# Altium PCB BOOSTXL-K350QVG-S1.PcbDoc (part 4 of 4)
Units mm, origin at the board's own origin, x right, y up, seen from the top; angles counter-clockwise.
Board outline 152.4 x 101.6 mm, 2 copper layers (Top Layer, Bottom Layer); 36 components, 58 nets, 6671 pads, 44 vias.
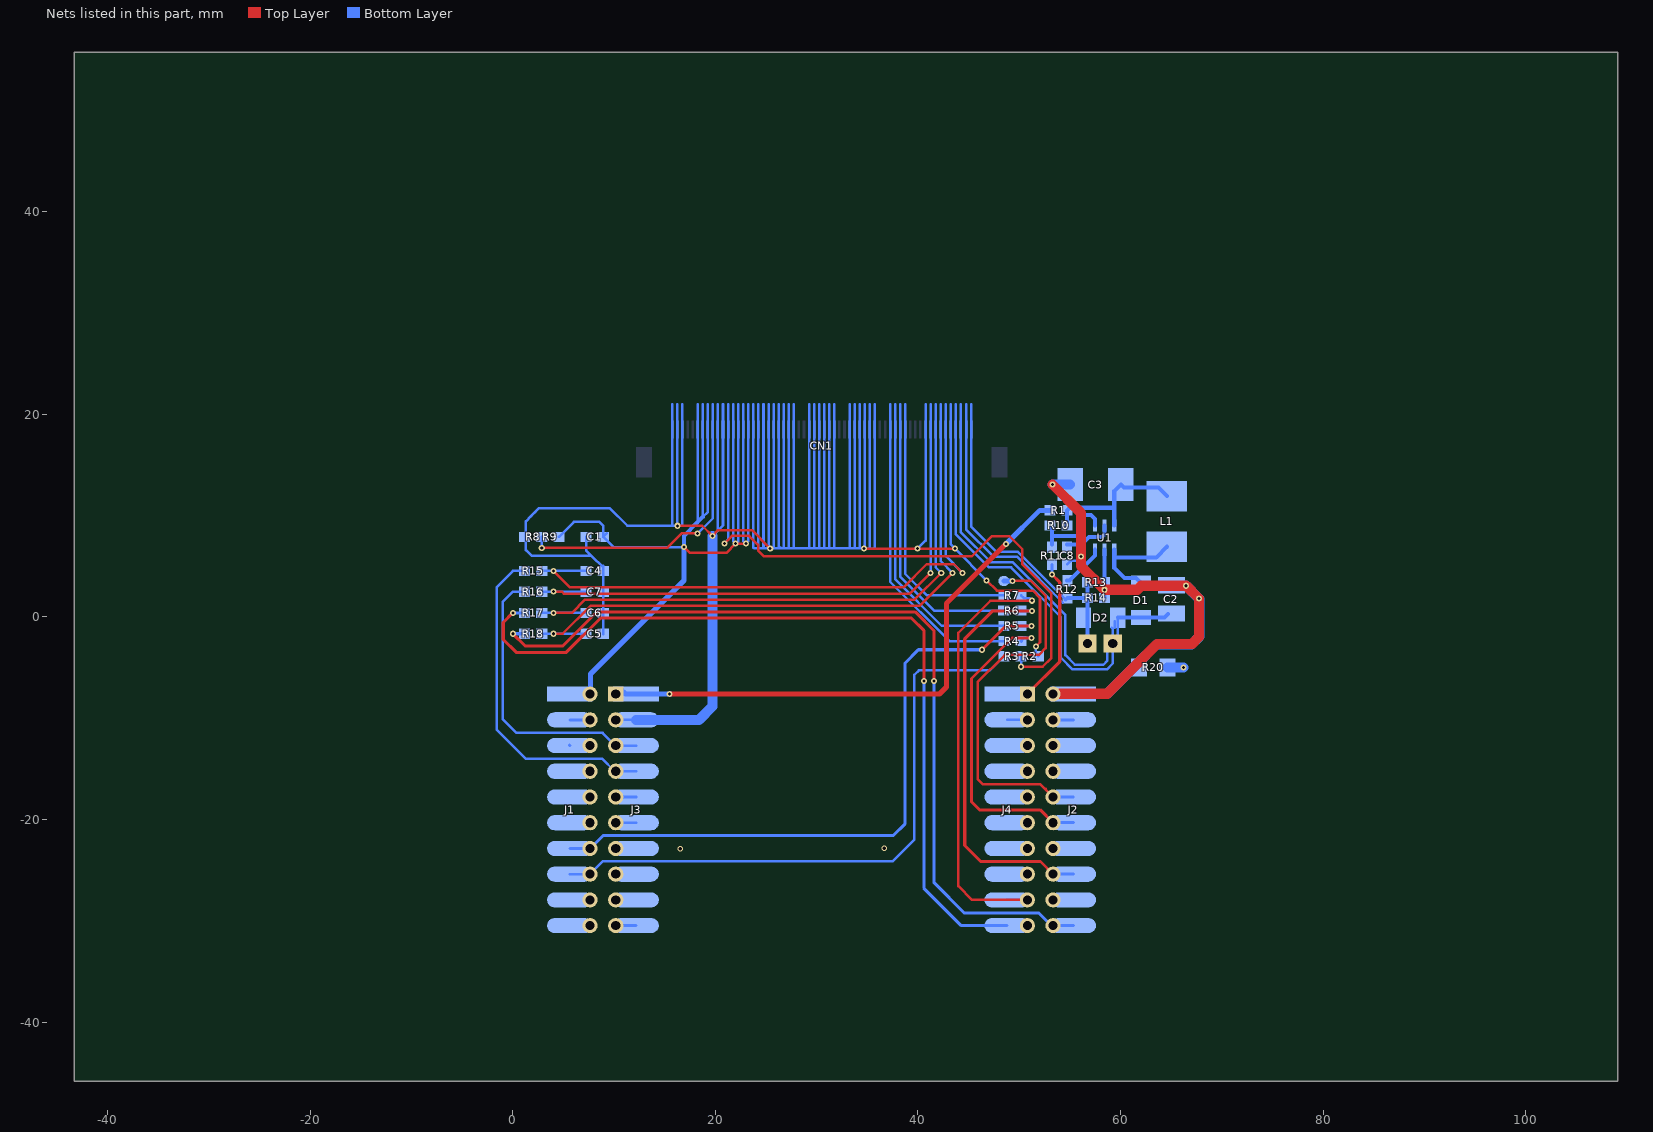
[diagram p4: the nets of this part, all layers, seen from the top]

## Free pads (board coordinates) (continued)
  round 0.018 on Bottom Overlay: 1(66.684,19.707) 1(66.684,20.205) 1(66.701,15.209) 1(66.701,18.16) 1(66.701,18.178) 1(66.701,18.196) 1(66.701,18.213) 1(66.701,19.689) 1(66.701,20.347) 1(66.719,15.226) 1(66.719,15.369) 1(66.719,18.107) 1(66.719,18.125) 1(66.719,18.142) 1(66.719,19.671) 1(66.719,20.187) 1(66.719,20.329) 1(66.737,15.244) 1(66.737,15.386) 1(66.737,18.053) 1(66.737,18.071) 1(66.737,18.089) 1(66.737,19.654) 1(66.737,20.169) 1(66.737,20.311) 1(66.755,15.262) 1(66.755,15.404) 1(66.755,18) 1(66.755,18.018) 1(66.755,18.036) 1(66.755,19.618) 1(66.755,19.636) 1(66.755,20.151) 1(66.755,20.294) 1(66.772,17.929) 1(66.772,17.947) 1(66.772,17.965) 1(66.772,17.982) 1(66.772,19.6) 1(66.772,20.134) 1(66.79,15.28) 1(66.79,15.422) 1(66.79,17.876) 1(66.79,17.893) 1(66.79,17.911) 1(66.79,19.582) 1(66.79,20.116) 1(66.79,20.276) 1(66.808,15.298) 1(66.808,15.44) 1(66.808,17.822) 1(66.808,17.84) 1(66.808,17.858) 1(66.808,19.565) 1(66.808,20.258) 1(66.826,15.315) 1(66.826,15.458) 1(66.826,17.751) 1(66.826,17.769) 1(66.826,17.787) 1(66.826,17.804) 1(66.826,19.511) 1(66.826,19.547) 1(66.826,20.098) 1(66.826,20.24) 1(66.844,15.475) 1(66.844,17.698) 1(66.844,17.716) 1(66.844,17.733) 1(66.844,19.511) 1(66.844,19.529) 1(66.844,20.08) 1(66.861,15.333) 1(66.861,15.493) 1(66.861,17.644) 1(66.861,17.662) 1(66.861,17.68) 1(66.861,19.494) 1(66.861,19.511) 1(66.861,20.063) 1(66.861,20.223) 1(66.879,15.351) 1(66.879,17.573) 1(66.879,17.591) 1(66.879,17.609) 1(66.879,17.627) 1(66.879,19.458) 1(66.879,19.476) 1(66.879,20.205) 1(66.897,15.369) 1(66.897,15.511) 1(66.897,17.52) 1(66.897,17.538) 1(66.897,17.556) 1(66.897,19.422) 1(66.897,19.44) 1(66.897,20.045) 1(66.897,20.187) 1(66.915,15.529) 1(66.915,17.484) 1(66.915,17.502) 1(66.915,19.387) 1(66.915,19.405) 1(66.915,20.027) 1(66.932,15.386) 1(66.932,19.351) 1(66.932,19.369) 1(66.932,20.169) 1(66.95,15.404) 1(66.95,15.546) 1(66.95,19.316) 1(66.95,19.334) 1(66.95,20.009) 1(66.95,20.151) 1(66.968,15.422) 1(66.968,15.564) 1(66.968,19.298) 1(66.968,19.974) 1(66.968,19.991) 1(66.968,20.134) 1(66.986,15.582) 1(66.986,15.6) 1(66.986,17.484) 1(66.986,19.262) 1(66.986,19.28) 1(66.986,19.956) 1(67.004,15.44) 1(67.004,15.618) 1(67.004,19.227) 1(67.004,19.245) 1(67.004,19.938) 1(67.004,20.116) 1(67.021,15.458) 1(67.021,15.635) 1(67.021,19.191) 1(67.021,19.209) 1(67.021,19.903) 1(67.021,19.92) 1(67.021,20.098) 1(67.039,15.475) 1(67.039,15.653) 1(67.039,15.671) 1(67.039,19.156) 1(67.039,19.174) 1(67.039,19.885) 1(67.039,20.08) 1(67.057,15.493) 1(67.057,15.689) 1(67.057,19.12) 1(67.057,19.138) 1(67.057,19.867) 1(67.057,20.063) 1(67.075,15.511) 1(67.075,15.529) 1(67.075,15.706) 1(67.075,19.085) 1(67.075,19.102) 1(67.075,19.831) 1(67.075,19.849) 1(67.075,20.027) 1(67.075,20.045) 1(67.092,15.546) 1(67.092,15.724) 1(67.092,15.742) 1(67.092,17.502) 1(67.092,19.067) 1(67.092,19.814) 1(67.092,20.009) 1(67.11,15.564) 1(67.11,15.76) 1(67.11,19.031) 1(67.11,19.049) 1(67.11,19.796) 1(67.11,19.991) 1(67.128,15.582) 1(67.128,15.778) 1(67.128,18.996) 1(67.128,19.014) 1(67.128,19.76) 1(67.128,19.778) 1(67.128,19.956) 1(67.128,19.974) 1(67.146,15.6) 1(67.146,15.795) 1(67.146,15.813) 1(67.146,18.96) 1(67.146,18.978) 1(67.146,19.743) 1(67.146,19.938) 1(67.164,15.618) 1(67.164,15.635) 1(67.164,15.831) 1(67.164,18.925) 1(67.164,18.942) 1(67.164,19.725) 1(67.164,19.92) 1(67.181,15.653) 1(67.181,15.849) 1(67.181,18.889) 1(67.181,18.907) 1(67.181,19.689) 1(67.181,19.707) 1(67.181,19.885) 1(67.181,19.903) 1(67.199,15.671) 1(67.199,15.866) 1(67.199,15.884) 1(67.199,17.52) 1(67.199,18.854) 1(67.199,18.871) 1(67.199,19.671) 1(67.199,19.867) 1(67.217,15.689) 1(67.217,15.902) 1(67.217,18.836) 1(67.217,19.654) 1(67.217,19.849) 1(67.235,15.706) 1(67.235,15.724) 1(67.235,15.92) 1(67.235,18.8) 1(67.235,18.818) 1(67.235,19.618) 1(67.235,19.636) 1(67.235,19.814) 1(67.235,19.831) 1(67.252,15.742) 1(67.252,15.938) 1(67.252,15.955) 1(67.252,18.765) 1(67.252,18.782) 1(67.252,19.6) 1(67.252,19.796) 1(67.27,15.76) 1(67.27,15.973) 1(67.27,18.729) 1(67.27,18.747) 1(67.27,19.582) 1(67.27,19.778) 1(67.288,15.778) 1(67.288,15.795) 1(67.288,15.991) 1(67.288,18.693) 1(67.288,18.711) 1(67.288,19.547) 1(67.288,19.565) 1(67.288,19.76) 1(67.306,15.813) 1(67.306,16.009) 1(67.306,16.026) 1(67.306,17.538) 1(67.306,18.658) 1(67.306,18.676) 1(67.306,19.529) 1(67.306,19.725) 1(67.306,19.743) 1(67.324,15.831) 1(67.324,16.044) 1(67.324,18.622) 1(67.324,18.64) 1(67.324,19.511) 1(67.324,19.707) 1(67.341,15.849) 1(67.341,15.866) 1(67.341,16.062) 1(67.341,18.587) 1(67.341,18.605) 1(67.341,19.476) 1(67.341,19.494) 1(67.341,19.689) 1(67.359,15.884) 1(67.359,16.08) 1(67.359,16.098) 1(67.359,18.533) 1(67.359,18.551) 1(67.359,18.569) 1(67.359,19.458) 1(67.359,19.654) 1(67.359,19.671) 1(67.377,15.902) 1(67.377,16.115) 1(67.377,18.462) 1(67.377,18.48) 1(67.377,18.498) 1(67.377,18.516) 1(67.377,19.422) 1(67.377,19.44) 1(67.377,19.636) 1(67.395,15.92) 1(67.395,15.938) 1(67.395,16.133) 1(67.395,18.409) 1(67.395,18.427) 1(67.395,18.445) 1(67.395,19.405) 1(67.395,19.618) 1(67.413,15.955) 1(67.413,16.151) 1(67.413,16.169) 1(67.413,17.556) 1(67.413,18.356) 1(67.413,18.373) 1(67.413,18.391) 1(67.413,19.387) 1(67.413,19.582) 1(67.413,19.6) 1(67.43,15.973) 1(67.43,15.991) 1(67.43,16.187) 1(67.43,18.285) 1(67.43,18.302) 1(67.43,18.32) 1(67.43,18.338) 1(67.43,19.369) 1(67.43,19.565) 1(67.448,16.009) 1(67.448,16.204) 1(67.448,16.222) 1(67.448,18.231) 1(67.448,18.249) 1(67.448,18.267) 1(67.448,19.334) 1(67.448,19.351) 1(67.448,19.547) 1(67.466,16.026) 1(67.466,16.24) 1(67.466,16.258) 1(67.466,18.178) 1(67.466,18.196) 1(67.466,18.213) 1(67.466,19.298) 1(67.466,19.316) 1(67.466,19.511) 1(67.466,19.529) 1(67.484,16.044) 1(67.484,16.062) 1(67.484,16.275) 1(67.484,16.293) 1(67.484,18.125) 1(67.484,18.142) 1(67.484,18.16) 1(67.484,19.245) 1(67.484,19.262) 1(67.484,19.28) 1(67.484,19.494) 1(67.501,16.08) 1(67.501,16.311) 1(67.501,16.329) 1(67.501,16.347) 1(67.501,17.573) 1(67.501,18.053) 1(67.501,18.071) 1(67.501,18.089) 1(67.501,18.107) 1(67.501,19.209) 1(67.501,19.227) 1(67.501,19.476) 1(67.519,16.098) 1(67.519,16.364) 1(67.519,16.382) 1(67.519,18) 1(67.519,18.018) 1(67.519,18.036) 1(67.519,19.174) 1(67.519,19.191) 1(67.519,19.44) 1(67.519,19.458) 1(67.537,16.115) 1(67.537,16.133) 1(67.537,16.4) 1(67.537,16.418) 1(67.537,17.947) 1(67.537,17.965) 1(67.537,17.982) 1(67.537,19.12) 1(67.537,19.138) 1(67.537,19.156) 1(67.537,19.422) 1(67.555,16.151) 1(67.555,16.169) 1(67.555,16.435) 1(67.555,16.453) 1(67.555,16.471) 1(67.555,17.893) 1(67.555,17.911) 1(67.555,17.929) 1(67.555,19.085) 1(67.555,19.102) 1(67.555,19.387) 1(67.555,19.405) 1(67.573,16.187) 1(67.573,16.204) 1(67.573,16.489) 1(67.573,16.507) 1(67.573,17.822) 1(67.573,17.84) 1(67.573,17.858) 1(67.573,17.876) 1(67.573,19.031) 1(67.573,19.049) 1(67.573,19.067) 1(67.573,19.351) 1(67.573,19.369) 1(67.59,16.222) 1(67.59,16.24) 1(67.59,16.524) 1(67.59,16.542) 1(67.59,17.591) 1(67.59,17.769) 1(67.59,17.787) 1(67.59,17.804) 1(67.59,18.996) 1(67.59,19.014) 1(67.59,19.298) 1(67.59,19.316) 1(67.59,19.334) 1(67.608,16.258) 1(67.608,16.275) 1(67.608,16.56) 1(67.608,16.578) 1(67.608,16.595) 1(67.608,17.698) 1(67.608,17.716) 1(67.608,17.733) 1(67.608,17.751) 1(67.608,18.942) 1(67.608,18.96) 1(67.608,18.978) 1(67.608,19.262) 1(67.608,19.28) 1(67.626,16.293) 1(67.626,16.311) 1(67.626,16.329) 1(67.626,16.613) 1(67.626,16.631) 1(67.626,17.644) 1(67.626,17.662) 1(67.626,17.68) 1(67.626,18.907) 1(67.626,18.925) 1(67.626,19.227) 1(67.626,19.245) 1(67.644,16.347) 1(67.644,16.364) 1(67.644,16.649) 1(67.644,16.667) 1(67.644,17.609) 1(67.644,17.627) 1(67.644,18.871) 1(67.644,18.889) 1(67.644,19.174) 1(67.644,19.191) 1(67.644,19.209) 1(67.661,16.382) 1(67.661,16.4) 1(67.661,16.418) 1(67.661,16.684) 1(67.661,16.702) 1(67.661,16.72) 1(67.661,18.818) 1(67.661,18.836) 1(67.661,18.854) 1(67.661,19.138) 1(67.661,19.156) 1(67.679,16.435) 1(67.679,16.453) 1(67.679,16.738) 1(67.679,16.755) 1(67.679,18.782) 1(67.679,18.8) 1(67.679,19.085) 1(67.679,19.102) 1(67.679,19.12) 1(67.697,16.471) 1(67.697,16.489) 1(67.697,16.773) 1(67.697,16.791) 1(67.697,16.809) 1(67.697,18.729) 1(67.697,18.747) 1(67.697,18.765) 1(67.697,19.049) 1(67.697,19.067) 1(67.715,16.507) 1(67.715,16.524) 1(67.715,16.542) 1(67.715,16.827) 1(67.715,16.844) 1(67.715,16.862) 1(67.715,18.693) 1(67.715,18.711) 1(67.715,18.996) 1(67.715,19.014) 1(67.715,19.031) 1(67.733,16.56) 1(67.733,16.578) 1(67.733,16.88) 1(67.733,16.898) 1(67.733,18.658) 1(67.733,18.676) 1(67.733,18.96) 1(67.733,18.978) 1(67.75,16.595) 1(67.75,16.613) 1(67.75,16.631) 1(67.75,16.915) 1(67.75,16.933) 1(67.75,18.622) 1(67.75,18.64) 1(67.75,18.907) 1(67.75,18.925) 1(67.75,18.942) 1(67.768,16.649) 1(67.768,16.667) 1(67.768,16.951) 1(67.768,16.969) 1(67.768,16.987) 1(67.768,17.004) 1(67.768,17.022) 1(67.768,18.445) 1(67.768,18.462) 1(67.768,18.48) 1(67.768,18.498) 1(67.768,18.516) 1(67.768,18.533) 1(67.768,18.551) 1(67.768,18.569) 1(67.768,18.587) 1(67.768,18.605) 1(67.768,18.871) 1(67.768,18.889) 1(67.786,16.684) 1(67.786,16.702) 1(67.786,16.72) 1(67.786,17.04) 1(67.786,17.058) 1(67.786,17.076) 1(67.786,17.093) 1(67.786,17.111) 1(67.786,17.129) 1(67.786,17.147) 1(67.786,17.164) 1(67.786,17.182) 1(67.786,17.2) 1(67.786,18.356) 1(67.786,18.373) 1(67.786,18.391) 1(67.786,18.409) 1(67.786,18.427) 1(67.786,18.836) 1(67.786,18.854) 1(67.804,16.738) 1(67.804,16.755) 1(67.804,17.218) 1(67.804,17.236) 1(67.804,17.253) 1(67.804,17.271) 1(67.804,17.289) 1(67.804,17.307) 1(67.804,17.324) 1(67.804,17.342) 1(67.804,17.36) 1(67.804,18.178) 1(67.804,18.196) 1(67.804,18.213) 1(67.804,18.231) 1(67.804,18.249) 1(67.804,18.267) 1(67.804,18.285) 1(67.804,18.302) 1(67.804,18.32) 1(67.804,18.338) 1(67.804,18.782) 1(67.804,18.8) 1(67.804,18.818) 1(67.821,16.773) 1(67.821,16.791) 1(67.821,16.809) 1(67.821,17.378) 1(67.821,17.396) 1(67.821,17.413) 1(67.821,17.431) 1(67.821,17.449) 1(67.821,17.467) 1(67.821,18.018) 1(67.821,18.036) 1(67.821,18.053) 1(67.821,18.071) 1(67.821,18.089) 1(67.821,18.107) 1(67.821,18.125) 1(67.821,18.142) 1(67.821,18.16) 1(67.821,18.747) 1(67.821,18.765) 1(67.839,16.827) 1(67.839,16.844) 1(67.839,16.862) 1(67.839,17.484) 1(67.839,17.502) 1(67.839,17.52) 1(67.839,17.538) 1(67.839,17.556) 1(67.839,17.573) 1(67.839,17.591) 1(67.839,17.609) 1(67.839,17.627) 1(67.839,17.929) 1(67.839,17.947) 1(67.839,17.965) 1(67.839,17.982) 1(67.839,18) 1(67.839,18.693) 1(67.839,18.711) 1(67.839,18.729) 1(67.857,16.88) 1(67.857,16.898) 1(67.857,17.644) 1(67.857,17.662) 1(67.857,17.68) 1(67.857,17.698) 1(67.857,17.804) 1(67.857,17.822) 1(67.857,17.84) 1(67.857,17.858) 1(67.857,17.876) 1(67.857,17.893) 1(67.857,17.911) 1(67.857,18.658) 1(67.857,18.676) 1(67.875,16.915) 1(67.875,16.933) 1(67.875,16.951) 1(67.875,16.969) 1(67.875,16.987) 1(67.875,17.716) 1(67.875,17.733) 1(67.875,17.751) 1(67.875,17.769) 1(67.875,17.787) 1(67.875,18.587) 1(67.875,18.605) 1(67.875,18.622) 1(67.875,18.64) 1(67.893,17.004) 1(67.893,17.022) 1(67.893,17.04) 1(67.893,17.058) 1(67.893,18.445) 1(67.893,18.462) 1(67.893,18.48) 1(67.893,18.498) 1(67.893,18.516) 1(67.893,18.533) 1(67.893,18.551) 1(67.893,18.569) 1(67.91,17.076) 1(67.91,17.093) 1(67.91,17.111) 1(67.91,17.129) 1(67.91,17.147) 1(67.91,17.164) 1(67.91,17.182) 1(67.91,17.2) 1(67.91,18.356) 1(67.91,18.373) 1(67.91,18.391) 1(67.91,18.409) 1(67.91,18.427) 1(67.928,17.218) 1(67.928,17.236) 1(67.928,17.253) 1(67.928,17.271) 1(67.928,17.289) 1(67.928,17.307) 1(67.928,17.324) 1(67.928,17.342) 1(67.928,18.213) 1(67.928,18.231) 1(67.928,18.249) 1(67.928,18.267) 1(67.928,18.285) 1(67.928,18.302) 1(67.928,18.32) 1(67.928,18.338) 1(67.946,17.36) 1(67.946,17.378) 1(67.946,17.396) 1(67.946,17.413) 1(67.946,17.431) 1(67.946,17.449) 1(67.946,17.467) 1(67.946,18.089) 1(67.946,18.107) 1(67.946,18.125) 1(67.946,18.142) 1(67.946,18.16) 1(67.946,18.178) 1(67.946,18.196) 1(67.964,17.484) 1(67.964,17.502) 1(67.964,17.52) 1(67.964,17.538) 1(67.964,17.556) 1(67.964,17.573) 1(67.964,17.965) 1(67.964,17.982) 1(67.964,18) 1(67.964,18.018) 1(67.964,18.036) 1(67.964,18.053) 1(67.964,18.071) 1(67.981,17.591) 1(67.981,17.609) 1(67.981,17.627) 1(67.981,17.644) 1(67.981,17.662) 1(67.981,17.68) 1(67.981,17.698) 1(67.981,17.84) 1(67.981,17.858) 1(67.981,17.876) 1(67.981,17.893) 1(67.981,17.911) 1(67.981,17.929) 1(67.981,17.947) 1(67.999,17.716) 1(67.999,17.733) 1(67.999,17.751) 1(67.999,17.769) 1(67.999,17.787) 1(67.999,17.804) 1(67.999,17.822)
  round 1.5 hole 0.9: 2(7.62,-7.62) 2(53.34,-7.62) 3(10.16,-10.16) 3(50.8,-10.16) 4(7.62,-10.16) 4(53.34,-10.16) 5(10.16,-12.7) 5(50.8,-12.7) 6(7.62,-12.7) 6(53.34,-12.7) 7(10.16,-15.24) 7(50.8,-15.24) 8(7.62,-15.24) 8(53.34,-15.24) 9(10.16,-17.78) 9(50.8,-17.78) 10(7.62,-17.78) 10(53.34,-17.78) 11(10.16,-20.32) 11(50.8,-20.32) 12(7.62,-20.32) 12(53.34,-20.32) 13(10.16,-22.86) 13(50.8,-22.86) 14(7.62,-22.86) 14(53.34,-22.86) 15(10.16,-25.4) 15(50.8,-25.4) 16(7.62,-25.4) 16(53.34,-25.4) 17(10.16,-27.94) 17(50.8,-27.94) 18(7.62,-27.94) 18(53.34,-27.94) 19(10.16,-30.48) 19(50.8,-30.48) 20(7.62,-30.48) 20(53.34,-30.48)
  rect 1.8x1.8 hole 0.9: 16(56.73,-2.62) 16(59.23,-2.62)

## Via types
v1: diameter 0.6, hole 0.3, Top Layer to Bottom Layer, 42 vias
v2: diameter 0.55, hole 0.35, Top Layer to Bottom Layer, 2 vias

## Nets (pads, with @x,y where several pads share a name; then routed paths per layer and width w, separated by ;. In a path a pad name is that pad's centre, name@x,y a point inside that pad or via, vN(x,y) a via of type N, cw(c..) or ccw(c..) an arc to the next point about the centre after c; other vN are vias at no path point)
3V3: C1.2 CN1.45 CN1.46 CN1.47 CN1.48 CN1.53 CN1.54 CN1.55 J1.1 pad.2@7.62,-7.62 R9.2 | length 133
  Top Layer w0.25: v1(16.9,6.9) 17.47,6.33 21.08,6.33 v1(22,7.25) 22.01,7.24 v1(23,7.24)
  Bottom Layer w0.25: R9.2@4.55,7.9 6.03,9.38 8.55,9.38 8.92,9.01 C1.2@8.92,7.91 ; C1.2@9.25,8.24 C1.2@8.92,7.91 ; v1(16.9,6.9) 9.93,6.9 C1.2@8.93,7.9 C1.2@8.92,7.91 ; 18.246,9.35 CN1.55@18.246,18.508 18.246,20.996 ; 18.746,20.996 CN1.54@18.746,18.508 18.746,9.85 19.246,10.35 CN1.53@19.246,18.508 19.246,20.996 ; 21.746,20.996 CN1.48@21.746,18.508 21.746,7.504 v1(22,7.25) ; v1@22.246,7.25 CN1.47@22.246,18.508 22.246,20.996 ; 22.746,20.996 CN1.46@22.746,18.508 22.746,7.494 v1(23,7.24) 23.246,7.486 CN1.45@23.246,18.508 23.246,20.996
  Bottom Layer w0.4: v1(16.9,6.9) 16.9,8.004 18.246,9.35 18.746,9.85
  Bottom Layer w0.5: J1.1@7.555,-7.195 7.66,-7.09 7.66,-5.64 16.9,3.6 v1(16.9,6.9)
5V0: J3.1 pad.1@10.16,-7.62 R1.2 | length 54.9
  Top Layer w0.5: v1(15.48,-7.62) 42.13,-7.62 42.82,-6.93 42.82,1.34 v1(48.68,7.2)
  Bottom Layer w0.5: J3.1@10.65,-7.13 11.14,-7.62 J3.1@12.16,-7.62 v1(15.48,-7.62) ; v1(48.68,7.2) 48.7,7.2 52.03,10.53 R1.2@53.03,10.53
AGND: C2.1 C3.2 C8.1 J2.1 pad.2@53.34,-7.62 R13.2 R14.2 R20.2 U1.2 | length 74
  Top Layer w1: v1(53.28,13.08) 56.08,10.28 v1(56.08,5.98) 56.08,5.033 v1(58.433,2.68) 61.65,2.68 62.05,3.08 v1(66.48,3.08) 67.75,1.81 v1(67.75,1.8) 67.75,-1.97 67.03,-2.69 63.59,-2.69 58.69,-7.59 53.37,-7.59 pad.2@53.34,-7.62
  Bottom Layer w0.25: J2.1@53.34,-7.597 pad.2@53.34,-7.62 J2.1@55.34,-7.62 ; C8.1@54.73,5.18 55.115,5.565 55.665,5.565 v1(56.08,5.98) ; C3.2@55.024,13.08 C3.2@55.03,13.074 ; R14.2@58.43,1.88 R14.2@58.433,1.883
  Bottom Layer w0.3: C2.1@64.68,3.08 C2.1@65.03,3.08
  Bottom Layer w0.4: R14.2@58.433,1.883 v1(58.433,2.68) 58.433,3.43 U1.2@58.433,6.635
  Bottom Layer w1: v1(53.28,13.08) C3.2@55.024,13.08 ; J2.1@55.34,-7.62 58.65,-7.62 61.555,-4.715 63.55,-2.72 67,-2.72 67.775,-1.945 67.775,1.785 67.755,1.805 v1(66.48,3.08)
CS: CN1.15 R6.2 | length 28.6
  Bottom Layer w0.25: 38.246,20.996 CN1.15@38.246,18.508 38.246,3.974 41.6,0.62 R6.2@48.47,0.62
GND: C1.1 C4.1 C5.1 C6.1 C7.1 CN1.5 CN1.10 CN1.20 CN1.21 CN1.22 CN1.23 CN1.24 CN1.25 CN1.28 CN1.29 CN1.30 CN1.31 CN1.32 CN1.33 CN1.36 CN1.37 CN1.38 CN1.39 CN1.40 CN1.41 CN1.42 CN1.43 CN1.44 CN1.50 CN1.51 CN1.58 CN1.59 CN1.60 J3.2 pad.3@10.16,-10.16 R2.1 R8.2 R20.1 | length 504.2
  Top Layer w0.25: v1(16.25,9) 18.7,9 v1(19.7,8) 20.27,8.57 23.6,8.57 v1(25.41,6.76) ; v1@34.67,6.75 v1(39.95,6.75) v1(43.65,6.75) ; v1(46.784,3.616) 47.8,2.6 51.34,2.6 52.05,1.89 52.05,-2.5 v1(51.64,-2.91)
  Bottom Layer w0.25: 2.19,10.34 1.803,9.953 ; C1.1@7.23,7.9 7.23,6.56 7.76,6.03 ; C5.1@8.93,-1.69 C5.1@8.93,-1.66 8.93,0.4 C7.1@8.93,2.49 8.93,3.75 C4.1@8.93,4.54 C4.1@8.93,4.86 ; C4.1@8.93,5.03 C4.1@8.93,4.86 ; pad.3@10.16,-10.16 J3.2@12.16,-10.16 ; 15.746,20.996 CN1.60@15.746,18.508 15.746,9 ; 16.246,20.996 CN1.59@16.246,18.508 16.246,9 15.746,9 ; v1(16.25,9) 16.646,9 16.746,9.1 CN1.58@16.746,18.508 16.746,20.996 ; v1(19.7,8) 20.246,8.546 ; 20.246,20.996 CN1.51@20.246,18.508 20.246,8.546 ; 20.746,20.996 CN1.50@20.746,18.508 20.746,9.046 20.246,8.546 ; 23.746,20.996 CN1.44@23.746,18.508 23.746,6.854 23.84,6.76 24.29,6.76 ; 24.246,20.996 CN1.43@24.246,18.508 24.246,6.804 24.29,6.76 ; 24.746,20.996 CN1.42@24.746,18.508 24.746,6.806 24.7,6.76 ; 25.246,20.996 CN1.41@25.246,18.508 25.246,6.924 v1(25.41,6.76) ; 25.746,20.996 CN1.40@25.746,18.508 25.746,6.874 25.86,6.76 ; 26.246,20.996 CN1.39@26.246,18.508 26.246,7.024 26.51,6.76 ; 26.746,20.996 CN1.38@26.746,18.508 26.746,6.846 26.66,6.76 ; 27.246,20.996 CN1.37@27.246,18.508 27.246,6.796 27.21,6.76 ; 27.746,20.996 CN1.36@27.746,18.508 27.746,6.874 27.86,6.76 ; 29.246,20.996 CN1.33@29.246,18.508 29.246,6.796 29.21,6.76 ; 29.746,20.996 CN1.32@29.746,18.508 29.746,6.824 29.81,6.76 ; 30.246,6.774 CN1.31@30.246,18.508 30.246,20.996 ; 30.746,20.996 CN1.30@30.746,18.508 30.746,6.796 30.71,6.76 ; 31.246,6.774 CN1.29@31.246,18.508 31.246,20.996 ; 31.746,20.996 CN1.28@31.746,18.508 31.746,6.796 31.71,6.76 ; 33.246,20.996 CN1.25@33.246,18.508 33.246,6.796 33.21,6.76 ; 33.746,20.996 CN1.24@33.746,18.508 33.746,6.796 33.71,6.76 ; 34.246,6.774 CN1.23@34.246,18.508 34.246,20.996 ; v1(34.66,6.76) 33.71,6.76 ; v1@34.67,6.75 35.2,6.75 ; v1@34.746,6.846 CN1.22@34.746,18.508 34.746,20.996 ; 35.246,20.996 CN1.21@35.246,18.508 35.246,6.796 35.2,6.75 ; 35.746,20.996 CN1.20@35.746,18.508 35.746,6.846 35.65,6.75 35.2,6.75 ; v1(39.95,6.75) 40.746,7.546 CN1.10@40.746,18.508 40.746,20.996 ; 43.246,20.996 CN1.5@43.246,18.508 43.246,7.154 v1(43.65,6.75) v1(46.784,3.616) ; v1(51.64,-2.91) 51.64,-3.64 R2.1@51.88,-3.88 ; 1.803,9.953 2.6,10.75 9.56,10.75 11.31,9 15.746,9 ; 1.803,9.953 1.29,9.44 1.29,7.9 1.29,6.61 1.87,6.03 7.76,6.03 ; 7.76,6.03 C4.1@8.93,4.86 ; 24.29,6.76 24.7,6.76 ; 24.7,6.76 v1(25.41,6.76) ; v1(25.41,6.76) 25.86,6.76 ; 25.86,6.76 26.51,6.76 ; 26.51,6.76 26.66,6.76 ; 26.66,6.76 27.21,6.76 ; 27.21,6.76 27.86,6.76 ; 27.86,6.76 29.21,6.76 ; 29.21,6.76 29.81,6.76 ; 29.81,6.76 30.71,6.76 ; 30.71,6.76 31.71,6.76 ; 31.71,6.76 33.21,6.76 ; 33.21,6.76 33.71,6.76
  Bottom Layer w0.5: pad.3@9.77,-10.16 pad.3@10.16,-10.16
  Bottom Layer w1: J3.2@12.16,-10.16 18.39,-10.16 19.7,-8.85 v1(19.7,8) ; R20.1@64.63,-4.99 66.19,-4.99 v1(66.2,-5)
  other v2: 16.52,-22.88 36.66,-22.83
LCD_RST: J4.9 pad.17@50.8,-27.94 R7.1 | length 44.3
  Top Layer w0.25: pad.17@50.8,-27.94 45.34,-27.94 43.98,-26.58 43.98,-1.56 47.14,1.6 v1(51.27,1.6)
  Bottom Layer w0.25: J4.9@48.8,-27.94 pad.17@50.8,-27.94 ; R7.1@50.18,2.12 50.45,1.85 51.02,1.85 v1(51.27,1.6)
LCD_SCL: J1.7 pad.14@7.62,-22.86 R5.1 | length 65.1
  Top Layer w0.3: v1(46.33,-3.24) 48.67,-0.9 v1(51.23,-0.9)
  Bottom Layer w0.3: J1.7@5.62,-22.86 pad.14@7.62,-22.86 7.64,-22.86 8.9,-21.6 37.54,-21.6 38.73,-20.41 38.73,-4.54 40.03,-3.24 v1(46.33,-3.24) ; R5.1@50.18,-0.88 50.2,-0.9 v1(51.23,-0.9)
LCD_SCS: J2.8 pad.16@53.34,-25.4 R6.1 | length 41.2
  Top Layer w0.3: v1(51.25,0.6) 47.38,0.6 44.62,-2.16 44.62,-22.57 46.2,-24.15 52.09,-24.15 pad.16@53.34,-25.4
  Bottom Layer w0.3: R6.1@50.17,0.62 50.19,0.6 v1(51.25,0.6) ; J2.8@53.3,-25.4 pad.16@53.34,-25.4 J2.8@55.34,-25.4
LCD_SDC: J1.8 pad.16@7.62,-25.4 R3.1 | length 61.3
  Bottom Layer w0.25: J1.8@5.62,-25.4 7.61,-25.4 7.615,-25.395 8.87,-24.14 37.47,-24.14 39.64,-21.97 39.64,-5.71 40.08,-5.27 47.09,-5.27 R3.1@48.48,-3.88
LCD_SDI: J2.6 pad.12@53.34,-20.32 R4.1 | length 31.9
  Top Layer w0.3: v1(51.21,-2.08) 49.29,-2.08 45.28,-6.09 45.28,-18.26 46.07,-19.05 52.07,-19.05 pad.12@53.34,-20.32
  Bottom Layer w0.3: R4.1@50.2,-2.4 R4.1@50.18,-2.38 50.48,-2.08 v1(51.21,-2.08) ; J2.6@53.32,-20.32 pad.12@53.34,-20.32 J2.6@55.34,-20.32
LED-A: C2.2 CN1.3 CN1.4 D1.K D2.K pad.16@59.23,-2.62 | length 85.2
  Bottom Layer w0.2: D2.K@59.43,-1.07 D2.K@59.43,-0.425
  Bottom Layer w0.25: 43.746,20.996 CN1.4@43.746,18.508 43.746,8.144 46.995,4.895 49.185,4.895 54.1,-0.02 54.1,-4.02 55.25,-5.17 58.65,-5.17 59.23,-4.59 pad.16@59.23,-2.62 ; 44.246,20.996 CN1.3@44.246,18.508 44.246,8.354 47.184,5.416 49.314,5.416 54.55,0.18 54.55,-3.77 55.5,-4.72 58.3,-4.72 58.7,-4.32 58.7,-3.15 pad.16@59.23,-2.62 ; D2.K@59.13,-1.07 59.23,-1.17 pad.16@59.23,-2.62 ; pad.16@59.73,-2.62 D2.K@59.73,-0.075
  Bottom Layer w0.4: D2.K@59.73,-0.075 62.03,-0.075 64.325,-0.075 C2.2@64.68,0.28
LED-K: CN1.1 CN1.2 D2.A pad.16@56.73,-2.62 R12.1 R13.1 R14.1 | length 57.9
  Bottom Layer w0.2: pad.16@56.705,-2.645 pad.16@56.93,-2.87
  Bottom Layer w0.25: 44.746,20.996 CN1.2@44.746,18.508 44.746,8.654 47.45,5.95 49.76,5.95 R12.1@54.295,1.415 ; 45.246,20.996 CN1.1@45.246,18.508 45.246,8.914 47.71,6.45 49.83,6.45 R12.1@54.58,1.7
  Bottom Layer w0.4: R12.1@54.58,1.7 R12.1@54.75,1.87 54.76,1.88 R14.1@56.73,1.88 ; pad.16@56.705,-2.645 pad.16@56.73,-2.62 56.73,-0.075 R14.1@56.73,1.88 ; R13.1@56.73,3.43 R14.1@56.73,1.88
LED_PWM: J4.1 pad.1@50.8,-7.62 R11.1 | length 14.4
  Top Layer w0.3: pad.1@50.8,-7.62 54,-4.42 54,3.41 v1(53.23,4.18)
  Bottom Layer w0.3: v1(53.23,4.18) R11.1@53.23,5.18
NetC3_1: C3.1 L1.1 R1.1 R10.1 U1.6 | length 15.6
  Bottom Layer w0.4: R10.1@54.73,9.03 R1.1@54.73,10.53 54.98,10.78 59.283,10.78 59.383,10.88 ; U1.6@59.383,9.035 59.383,10.88 ; L1.1@64.58,11.93 63.73,12.78 60.324,12.78 C3.1@60.03,13.074 59.383,12.427 59.383,10.88
NetC8_2: C8.2 U1.5 | length 5
  Bottom Layer w0.4: C8.2@54.73,7.13 56.13,7.13 56.88,7.88 58.18,7.88 58.433,8.133 U1.5@58.433,9.035
NetCN1_49: CN1.49 R2.2 R3.2 | length 62.4
  Top Layer w0.25: v1(20.89,7.27) 21.62,8 23.33,8 24.22,7.11 24.22,6.56 24.8,5.98 45.31,5.98 47.3,7.97 49.01,7.97 50.3,6.68 50.3,5.19 53.17,2.32 53.17,-4.06 52.31,-4.92 v1(50.18,-4.92)
  Bottom Layer w0.25: v1(20.89,7.27) 21.246,7.626 CN1.49@21.246,18.508 21.246,20.996 ; v1(50.18,-4.92) R2.2@50.18,-3.88
NetJ1_2: J1.2 pad.4@7.62,-10.16 | length 1.9
  Bottom Layer w0.3: J1.2@5.62,-10.16 7.12,-10.16 J1.2@7.37,-10.41
NetJ1_3: J1.3 pad.6@7.62,-12.7 | length 0
  Bottom Layer w0.3: J1.3@5.59,-12.67 J1.3@5.62,-12.7
NetJ1_4: J1.4 pad.8@7.62,-15.24
NetJ1_5: J1.5 pad.10@7.62,-17.78
NetJ1_6: J1.6 pad.12@7.62,-20.32
NetJ1_8: 
NetJ1_9: J1.9 pad.18@7.62,-27.94
NetJ1_10: J1.10 pad.20@7.62,-30.48
NetJ2_2: J2.2 pad.4@53.34,-10.16 | length 1.8
  Bottom Layer w0.3: J2.2@53.69,-10.51 54.04,-10.16 J2.2@55.34,-10.16
NetJ2_3: J2.3 pad.6@53.34,-12.7
NetJ2_4: J2.4 pad.8@53.34,-15.24
NetJ2_7: J2.7 pad.14@53.34,-22.86
NetJ2_9: J2.9 pad.18@53.34,-27.94
NetJ2_10: J2.10 pad.20@53.34,-30.48 R18.1 | length 85.8
  Top Layer w0.3: v1(0,-1.66) 1.19,-2.85 4.95,-2.85 8.3,0.5 39.72,0.5 41.6,-1.38 v1(41.6,-6.33)
  Bottom Layer w0.3: v1(0,-1.66) R18.1@1.15,-1.66 ; v1(41.6,-6.33) 41.6,-26.25 44.6,-29.25 51.95,-29.25 53.18,-30.48 pad.20@53.34,-30.48 J2.10@55.34,-30.48
NetJ3_3: J3.3 pad.5@10.16,-12.7 R16.1 | length 28.4
  Bottom Layer w0.25: R16.1@1.15,2.49 0.01,2.49 -1.02,1.46 -1.02,-10.07 0.36,-11.45 8.85,-11.45 10.1,-12.7 pad.5@10.16,-12.7 J3.3@10.17,-12.7 ; J3.3@10.165,-12.695 J3.3@10.17,-12.7 ; J3.3@12.16,-12.7 J3.3@10.17,-12.7
NetJ3_4: J3.4 pad.7@10.16,-15.24 R15.1 | length 33
  Bottom Layer w0.25: R15.1@1.15,4.54 0.01,4.54 -1.61,2.92 -1.61,-11.13 1.25,-13.99 8.81,-13.99 10.06,-15.24 pad.7@10.16,-15.24 J3.4@12.16,-15.24
NetJ3_5: J3.5 pad.9@10.16,-17.78 | length 2
  Bottom Layer w0.25: pad.9@10.16,-17.78 J3.5@12.16,-17.78
NetJ3_6: J3.6 pad.11@10.16,-20.32 | length 2
  Bottom Layer w0.25: J3.6@10.15,-20.32 pad.11@10.16,-20.32 J3.6@12.16,-20.32
NetJ3_7: J3.7 pad.13@10.16,-22.86
NetJ3_8: J3.8 pad.15@10.16,-25.4
NetJ3_9: J3.9 pad.17@10.16,-27.94
NetJ3_10: J3.10 pad.19@10.16,-30.48 | length 1.9
  Bottom Layer w0.3: J3.10@10.39,-30.71 10.62,-30.48 J3.10@12.16,-30.48
NetJ4_2: J4.2 pad.3@50.8,-10.16 | length 2
  Bottom Layer w0.25: J4.2@48.8,-10.16 50.79,-10.16 J4.2@50.795,-10.165
NetJ4_3: J4.3 pad.5@50.8,-12.7
NetJ4_4: J4.4 pad.7@50.8,-15.24
NetJ4_5: J4.5 pad.9@50.8,-17.78
NetJ4_6: J4.6 pad.11@50.8,-20.32
NetJ4_7: J4.7 pad.13@50.8,-22.86
NetJ4_8: J4.8 pad.15@50.8,-25.4
NetJ4_10: J4.10 pad.19@50.8,-30.48 R17.2 | length 83.3
  Top Layer w0.3: v1(0,0.4) -0.95,-0.55 -0.95,-2.22 0.33,-3.5 5.27,-3.5 8.67,-0.1 39.35,-0.1 40.58,-1.33 v1(40.58,-6.32)
  Bottom Layer w0.3: v1(0,0.4) R17.2@1.15,0.4 ; v1(40.58,-6.32) 40.58,-26.78 44.28,-30.48 J4.10@48.8,-30.48
NetR10_2: R10.2 R11.2 U1.4 | length 8.8
  Bottom Layer w0.4: R10.2@53.03,9.03 53.23,8.83 53.23,7.98 ; R11.2@53.23,7.13 53.23,7.98 ; U1.4@57.483,9.035 57.483,9.674 57.08,10.077 56.177,10.077 55.98,9.88 55.98,8.28 55.68,7.98 53.23,7.98
NetR12_2: R12.2 U1.3 | length 4.3
  Bottom Layer w0.4: R12.2@54.73,3.58 54.75,3.58 54.98,3.58 57.483,6.083 U1.3@57.483,6.635
PS0: CN1.52 R8.1 R9.1 | length 30.5
  Top Layer w0.25: v1(2.85,6.81) 15.23,6.81 16.66,8.24 v1(18.24,8.24)
  Bottom Layer w0.25: v1(2.85,6.81) R9.1@2.85,7.9 ; v1(18.24,8.24) 19.746,9.746 CN1.52@19.746,18.508 19.746,20.996
RESET: J2.5 pad.0 pad.10@53.34,-17.78 | length 37.9
  Top Layer w0.25: v1(49.35,3.55) 51.15,3.55 52.6,2.1 52.6,-3.07 51.93,-3.74 48.58,-3.74 45.89,-6.43 45.89,-16.02 46.38,-16.51 52.07,-16.51 52.61,-17.05 ; 52.61,-16.96 52.61,-17.05 ; pad.10@53.34,-17.78 52.61,-17.05
  Bottom Layer w0.25: pad.10@53.34,-17.78 J2.5@55.34,-17.78
  Bottom Layer w0.5: pad.0@48.48,3.55 v1(49.35,3.55)
RST: CN1.14 R7.2 | length 27.4
  Bottom Layer w0.25: 38.746,20.996 CN1.14@38.746,18.508 38.746,4.254 40.88,2.12 R7.2@48.48,2.12
SCLK: CN1.16 R5.2 | length 29.9
  Bottom Layer w0.25: 37.746,20.996 CN1.16@37.746,18.508 37.746,3.724 42.35,-0.88 R5.2@48.48,-0.88
SDA: CN1.17 R4.2 | length 31.2
  Bottom Layer w0.25: 37.246,20.996 CN1.17@37.246,18.508 37.246,3.474 43.1,-2.38 R4.2@48.48,-2.38
SW: D1.A L1.2 U1.1 | length 10.7
  Bottom Layer w0.4: U1.1@59.383,6.635 59.383,5.88 ; D1.A@62.03,3.33 61.53,3.83 60.386,3.83 59.383,4.833 59.383,5.88 ; L1.2@64.58,6.93 63.53,5.88 59.383,5.88
TOUCH_XN: C6.2 CN1.8 R17.1 | length 61.8
  Top Layer w0.25: v1(4,0.4) 5.83,0.4 7.13,1.7 39.65,1.7 v1(42.3,4.35)
  Bottom Layer w0.25: R17.1@2.85,0.4 v1(4,0.4) C6.2@7.22,0.4 ; 41.746,7.904 41.746,8.55 ; 41.746,20.996 CN1.8@41.746,18.508 41.746,8.55 ; v1(42.3,4.35) 41.746,4.904 41.746,8.55
TOUCH_XP: C4.2 CN1.6 R15.2 | length 64.1
  Top Layer w0.25: v1(4,4.54) 5.63,2.91 38.56,2.91 40.85,5.2 43.55,5.2 v1(44.4,4.35)
  Bottom Layer w0.25: R15.2@2.85,4.54 v1(4,4.54) C4.2@7.23,4.54 ; 42.746,20.996 CN1.6@42.746,18.508 42.746,6.004 v1(44.4,4.35)
TOUCH_YN: C5.2 CN1.7 R18.2 | length 63.4
  Top Layer w0.25: v1(4,-1.66) 4.91,-1.66 7.67,1.1 40.15,1.1 v1(43.4,4.35)
  Bottom Layer w0.25: R18.2@2.85,-1.66 v1(4,-1.66) C5.2@7.23,-1.66 ; 42.246,20.996 CN1.7@42.246,18.508 42.246,5.504 v1(43.4,4.35)
TOUCH_YP: C7.2 CN1.9 R16.2 | length 59.9
  Top Layer w0.25: v1(4,2.49) 4.84,2.49 5.02,2.31 39.21,2.31 v1(41.25,4.35)
  Bottom Layer w0.25: R16.2@2.85,2.49 v1(4,2.49) C7.2@7.23,2.49 ; 41.246,7.254 41.246,7.95 ; 41.246,20.996 CN1.9@41.246,18.508 41.246,7.95 ; v1(41.25,4.35) 41.246,4.354 41.246,7.95
pads on no net: CN1. CN1.11 CN1.12 CN1.13 CN1.18 CN1.19 CN1.26 CN1.27 CN1.34 CN1.35 CN1.56 CN1.57
copper on no net: | length 54.7
  Bottom Layer w0.25: 17.246,16.02 17.246,18.508 17.246,20.996 ; 17.746,16.02 17.746,18.508 17.746,20.996 ; 28.246,16.02 28.246,18.508 28.246,20.996 ; 28.746,16.02 28.746,18.508 28.746,20.996 ; 32.246,16.02 32.246,18.508 32.246,20.996 ; 32.746,16.02 32.746,18.508 32.746,20.996 ; 36.246,16.02 36.246,18.508 36.246,20.996 ; 36.746,16.02 36.746,18.508 36.746,20.996 ; 39.246,16.02 39.246,18.508 39.246,20.996 ; 39.746,16.02 39.746,18.508 39.746,20.996 ; 40.246,16.02 40.246,18.508 40.246,20.996

## Polygon pours and split planes (outlines as drawn)
GND on Top Layer "GND_TOP" (solid, pour order 1000): -7.97,-41.88 -7.97,22.02 68.93,22.02 68.93,-41.88 51.13,-41.88 51.13,-33.02 9.83,-33.02 9.83,-41.88
GND on Bottom Layer "GND_Bot" (solid, pour order 1002): -7.97,22.02 -7.97,-41.88 9.83,-41.88 9.83,-33.02 51.13,-33.02 51.13,-41.88 68.93,-41.88 68.93,22.02
AGND on Bottom Layer "GND_Bot" (solid, remove dead copper, pour order 1001): 53.78,14.74 53.78,11.05 52.48,11.05 52.48,1.625 52.455,1.625 54.1,-0.02 54.1,-4.02 54.1,-5.84 53.11,-6.83 54.37,-8.09 58.72,-8.09 63.79,-3.02 66.93,-3.02 67.96,-1.99 67.96,2.06 66.6,3.42 66.6,13.42 62.58,13.42 62.58,13 62.57,12.99 61.29,12.99 61.29,14.71 61.28,14.72
GND on Top Overlay "GND_Bot" (solid, remove dead copper): -7.97,-41.88 9.83,-41.88 9.83,-33.02 51.13,-33.02 51.13,-41.88 68.93,-41.88 68.93,22.02 -7.97,22.02

## Keep-outs
Keep-Out Layer:
  lines w0.05: -7.97,-41.88 -7.97,22.02 68.93,22.02 68.93,-41.88 51.13,-41.88 51.13,-33.02 9.83,-33.02 9.83,-41.88 -7.97,-41.88

## Other copper
Top Layer:
  rectangle net GND: 65.19,-6.06 67.49,-4.04
Bottom Layer:
  rectangle net GND: 63.576,-6.144 67.77,-3.836

## Silkscreen, mask and mechanical layers (free items; w line width, h text height)
Bottom Overlay:
  drawing of 3885 lines, arcs and shapes, not listed
  text "K350QVG-V2-F" at 33.93,20.39 h1
  text "1" at 46.2,18.75 h1
  text "BOOSTXL-" at 3.53,17.77 h1.2
  text "K350QVG-S1" at 4.57,15.67 h1.2
  text "SPI-4_SPI-3" at 7.28,9.18 h1
  text "PCB_V1.0" at 33.68,7.45 h1.2
  text "X+" at 6.02,4.05 h1
  text "RESET" at 47.49,3.5 h1
  text "Y+" at 6.03,2 h1
  text "X-" at 5.97,-0.11 h1
  text "Y-" at 6.03,-2.14 h1
  text "K" at 55.1,-3.48 h1.2
  text "A" at 61.55,-3.5 h1.2
  text "1" at 3.52,-6.38 h1
  text "40" at 47.45,-6.41 h1
  text "20" at 58.36,-6.41 h1
  text "21" at 14.9,-6.5 h1
  text "PWM" at 45.88,-8.07 h1
  text "GND" at 61.3,-8.2 h1.2
  text "VUSB" at 20.4,-8.35 h1.5
  text "GND" at 17.43,-10.67 h1
  text "Y+" at 16.85,-13.1 h1
  text "X+" at 16.85,-15.7 h1
  text "LCD_SDI" at 63.44,-20.76 h1
  text "LCD_SCL" at 2.75,-23.35 h1
  text "LCD_SCS" at 64.12,-25.86 h1
  text "(LCD_SDC)" at 2.85,-25.9 h1
  text "LCD_RESET" at 45.95,-28.45 h1
  text "Y-" at 60.05,-30.85 h1
  text "X-" at 45.9,-31 h1
  text "10" at 4.44,-32.65 h1
  text "31" at 47.46,-32.63 h1
  text "30" at 14.62,-32.66 h1
  text "J3" at 11.4,-32.74 h1
  text "11" at 58.02,-32.74 h1
  text "J2" at 54.51,-32.76 h1
  text "J4" at 50.96,-32.79 h1
  text "J1" at 7.88,-32.85 h1
Mechanical 1:
  lines w0.1: -12.658,-40.356 -12.15,-41.88 ; -12.658,-9.144 -12.15,-7.62 ; -12.404,-41.88 -8.249,-41.88 ; -12.404,-7.62 3.014,-7.62 ; -12.15,-32.306 -12.15,-41.88 ; -12.15,-18.002 -12.15,-7.62 ; -11.642,-40.356 -12.15,-41.88 ; -11.642,-9.144 -12.15,-7.62 ; -7.97,22.299 -7.97,26.954 ; -6.446,26.192 -7.97,26.7 ; -6.446,27.208 -7.97,26.7 ; 22.924,26.7 -7.97,26.7 ; 37.228,26.7 68.93,26.7 ; 67.406,26.192 68.93,26.7 ; 67.406,27.208 68.93,26.7 ; 68.93,22.299 68.93,26.954 ; 69.209,-41.88 72.734,-41.88 ; 69.209,22.02 72.734,22.02 ; 71.972,-40.356 72.48,-41.88 ; 71.972,20.496 72.48,22.02 ; 72.48,-17.486 72.48,-41.88 ; 72.48,-3.182 72.48,22.02 ; 72.988,-40.356 72.48,-41.88 ; 72.988,20.496 72.48,22.02
  text "76.90 (mm)" at 36.75,25.95 h1.5
  text "63.90 (mm)" at 71.85,-17.05 h1.5 r270
  text "34.26 (mm)" at -12.9,-31.95 h1.5 r270